# Altium PCB PMM_MSPC_22A.PcbDoc (part 5 of 5)
Units mm, origin at the board's own origin, x right, y up, seen from the top; angles counter-clockwise.
Board outline 86.91 x 61.9 mm, 4 copper layers (Top Layer, GroundPlane, MidLayer1, Bottom Layer); 159 components, 129 nets, 534 pads, 221 vias.
Unrouted connection lines stored in the file: 40.
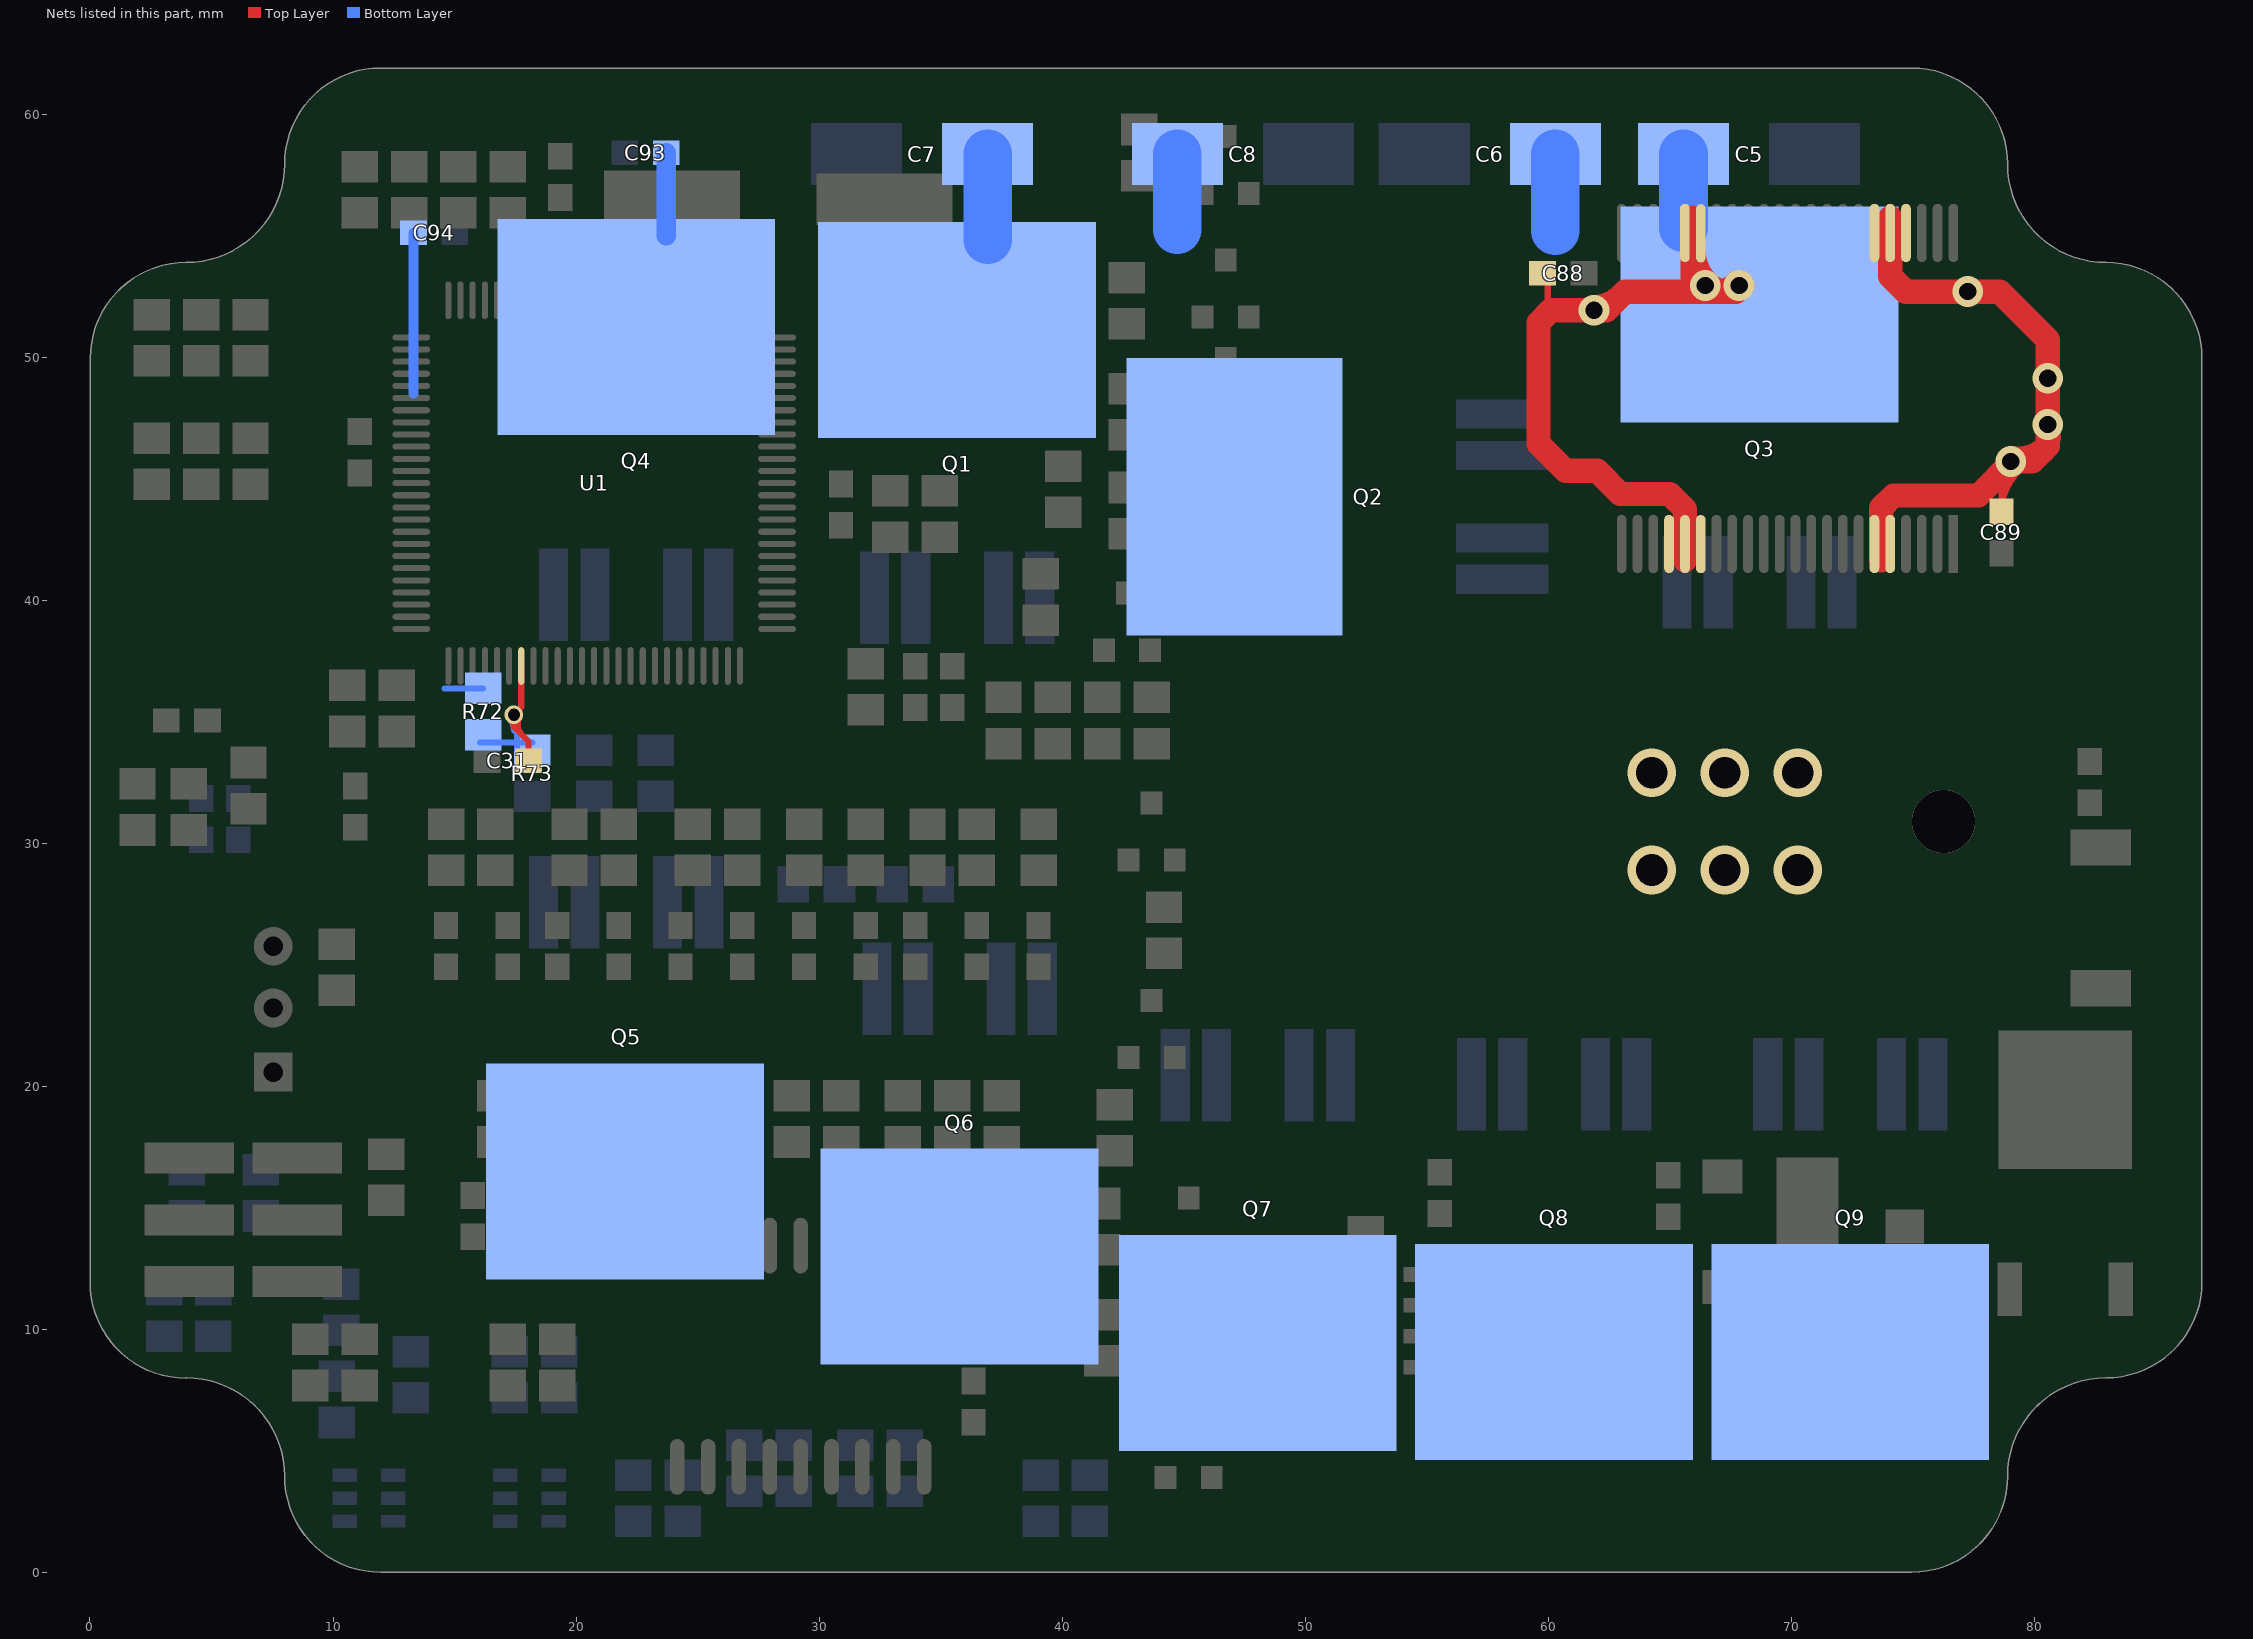
[diagram p7: the nets of this part, all layers, seen from the top]

## Via types
v1: diameter 0.762, hole 0.508, Top Layer to Bottom Layer, 138 vias
v2: diameter 2, hole 1.3, Top Layer to Bottom Layer, 26 vias
v3: diameter 1.27, hole 0.711, Top Layer to Bottom Layer, tented top, 23 vias
v4: diameter 0.762, hole 0.508, Top Layer to Bottom Layer, tented bottom, 21 vias
v5: diameter 1.27, hole 0.711, Top Layer to Bottom Layer, 7 vias
v6: diameter 0.762, hole 0.508, Top Layer to Bottom Layer, tented both sides, 5 vias
v7: diameter 2.6, hole 2.6, Top Layer to Bottom Layer, 1 vias

## Nets (pads, with @x,y where several pads share a name; then routed paths per layer and width w, separated by ;. In a path a pad name is that pad's centre, name@x,y a point inside that pad or via, vN(x,y) a via of type N, cw(c..) or ccw(c..) an arc to the next point about the centre after c; other vN are vias at no path point) (continued)
Vbatt: C5.2 C6.1 C7.1 C8.2 C88.2 C89.1 C93.1 C94.2 pad.5 pad.6 pad.17 pad.18 pad.19 pad.27 pad.28 pad.39 pad.40 pad.41 Q1.3 Q2.3 Q3.3 Q4.3 Q5.3 Q6.3 Q7.3 Q8.3 Q9.3 R72.2 | length 141.9
  Top Layer w0.254: 59.99,52.185 C88.2@59.99,53.24 ; C89.1@78.659,43.637 v3@78.659,45.581 ; C89.1@78.659,43.602 cw(c81.089,43.602) v3@79.394,45.344 ; C89.1@78.659,43.602 cw(c81.089,43.602) v3@79.394,45.344 ; C89.1@78.659,43.602 cw(c81.089,43.602) v3@79.394,45.344 ; C89.1@78.659,43.602 cw(c81.089,43.602) v3@79.394,45.344 ; C89.1@78.659,43.602 cw(c81.089,43.602) v3@79.394,45.344 ; 78.659,44.204 cw(c80.504,44.204) v3@79.217,45.526 ; 78.659,44.204 cw(c80.504,44.204) v3@79.217,45.526 ; 78.659,44.204 cw(c80.504,44.204) v3@79.217,45.526 ; 78.659,44.204 cw(c80.504,44.204) v3@79.217,45.526 ; 78.659,44.204 cw(c80.504,44.204) v3@79.217,45.526 ; 78.659,44.806 cw(c79.918,44.806) v3(79.04,45.708) ; 78.659,44.806 cw(c79.918,44.806) v3(79.04,45.708) ; 78.659,44.806 cw(c79.918,44.806) v3(79.04,45.708) ; 78.659,44.806 cw(c79.918,44.806) v3(79.04,45.708) ; 78.659,44.806 cw(c79.918,44.806) v3(79.04,45.708)
  Top Layer w1: pad.18@65.635,41.644 65.635,43.746 65.006,44.375 62.974,44.375 62.022,45.327 60.72,45.327 59.609,46.438 59.609,51.423 60.117,51.931 62.403,51.931 63.165,52.693 67.737,52.693 v3@67.991,52.947 ; v3@65.959,52.947 65.959,55.741 ; 73.706,41.644 73.706,43.803 74.214,44.311 77.711,44.311 79.108,45.708 79.929,45.708 80.564,46.343 ; pad.40@74.08,55.741 74.08,53.335 74.722,52.693 78.586,52.693 80.564,50.715 80.564,46.343 ; v3@61.895,52.066 ccw(c61.895,53.618) 62.993,52.521 ; v3@61.895,52.066 ccw(c61.895,53.618) 62.993,52.521 ; v3@61.895,52.066 ccw(c61.895,53.618) 62.993,52.521 ; v3@61.895,52.066 ccw(c61.895,53.618) 62.993,52.521 ; v3@61.895,52.066 ccw(c61.895,53.618) 62.993,52.521 ; 65.528,52.693 ccw(c65.528,53.886) v3@66.372,53.042 ; 65.528,52.693 ccw(c65.528,53.886) v3@66.372,53.042 ; 65.528,52.693 ccw(c65.528,53.886) v3@66.372,53.042 ; 65.528,52.693 ccw(c65.528,53.886) v3@66.372,53.042 ; 65.528,52.693 ccw(c65.528,53.886) v3@66.372,53.042 ; 65.959,54.499 ccw(c68.019,54.499) v3@66.562,53.042 ; 65.959,54.499 ccw(c68.019,54.499) v3@66.562,53.042 ; 65.959,54.499 ccw(c68.019,54.499) v3@66.562,53.042 ; 65.959,54.499 ccw(c68.019,54.499) v3@66.562,53.042 ; 65.959,54.499 ccw(c68.019,54.499) v3@66.562,53.042 ; v3@66.562,53.042 ccw(c67.406,53.886) v3@67.406,52.693 ; v3@66.562,53.042 ccw(c67.406,53.886) v3@67.406,52.693 ; v3@66.562,53.042 ccw(c67.406,53.886) v3@67.406,52.693 ; v3@66.562,53.042 ccw(c67.406,53.886) v3@67.406,52.693 ; v3@66.562,53.042 ccw(c67.406,53.886) v3@67.406,52.693 ; v3@66.925,52.693 ccw(c66.925,53.886) v3@67.769,53.042 ; v3@66.925,52.693 ccw(c66.925,53.886) v3@67.769,53.042 ; v3@66.925,52.693 ccw(c66.925,53.886) v3@67.769,53.042 ; v3@66.925,52.693 ccw(c66.925,53.886) v3@67.769,53.042 ; v3@66.925,52.693 ccw(c66.925,53.886) v3@67.769,53.042 ; v3@79.059,45.842 ccw(c79.31,47.596) 80.564,46.343 ; v3@79.059,45.842 ccw(c79.31,47.596) 80.564,46.343 ; v3@79.059,45.842 ccw(c79.31,47.596) 80.564,46.343 ; v3@79.059,45.842 ccw(c79.31,47.596) 80.564,46.343 ; v3@79.059,45.842 ccw(c79.31,47.596) 80.564,46.343 ; 80.374,46.153 ccw(c79.826,46.7) v3@80.454,47.153 ; 80.374,46.153 ccw(c79.826,46.7) v3@80.454,47.153 ; 80.374,46.153 ccw(c79.826,46.7) v3@80.454,47.153 ; 80.374,46.153 ccw(c79.826,46.7) v3@80.454,47.153 ; 80.374,46.153 ccw(c79.826,46.7) v3@80.454,47.153
  Bottom Layer w0.254: 14.59,36.371 R72.2@16.175,36.371
  Bottom Layer w0.4: 13.31,48.51 C94.2@13.31,55.12
  Bottom Layer w0.8: Q4.3@23.71,54.99 C93.1@23.71,58.42
  Bottom Layer w2: Q1.3@36.936,54.836 C7.1@36.936,58.362 ; 44.744,55.256 C8.2@44.744,58.362 ; 60.304,55.204 C6.1@60.304,58.362 ; Q3.3@65.572,55.328 C5.2@65.572,58.362
  other v2: 64.27,28.9 67.27,28.9 70.27,28.9 64.27,32.9 67.27,32.9 70.27,32.9
  other v3: 80.564,47.232 80.564,49.137 61.895,51.931 77.27,52.7 66.467,52.947 67.864,52.947
  other v7: 76.27,30.9
Vbatt_split: C31.1 R72.1 R73.1 U1.82 | length 27.1
  Top Layer w0.254: U1.82@17.747,37.294 17.747,35.596 v1(17.445,35.294) ; C31.1@18.041,33.389 18.041,34.19 17.445,34.786 ; v1@17.293,35.091 cw(c17.064,34.786) 17.445,34.786 ; v1@17.293,35.091 cw(c17.064,34.786) 17.445,34.786 ; v1@17.293,35.091 cw(c17.064,34.786) 17.445,34.786 ; v1@17.293,35.091 cw(c17.064,34.786) 17.445,34.786 ; v1@17.293,35.091 cw(c17.064,34.786) 17.445,34.786 ; v1@17.293,35.091 cw(c17.064,34.786) 17.445,34.786 ; v1@17.293,35.091 cw(c17.064,34.786) 17.445,34.786 ; v1@17.293,35.091 cw(c17.064,34.786) 17.445,34.786 ; v1@17.293,35.091 cw(c17.064,34.786) 17.445,34.786 ; v1@17.293,35.091 cw(c17.064,34.786) 17.445,34.786 ; 17.445,34.786 cw(c17.826,34.786) v1@17.597,35.091 ; 17.445,34.786 cw(c17.826,34.786) v1@17.597,35.091 ; 17.445,34.786 cw(c17.826,34.786) v1@17.597,35.091 ; 17.445,34.786 cw(c17.826,34.786) v1@17.597,35.091 ; 17.445,34.786 cw(c17.826,34.786) v1@17.597,35.091 ; 17.445,34.786 cw(c17.826,34.786) v1@17.597,35.091 ; 17.445,34.786 cw(c17.826,34.786) v1@17.597,35.091 ; 17.445,34.786 cw(c17.826,34.786) v1@17.597,35.091 ; 17.445,34.786 cw(c17.826,34.786) v1@17.597,35.091 ; 17.445,34.786 cw(c17.826,34.786) v1@17.597,35.091 ; 17.445,34.786 v1(17.445,35.294) ; v1(17.445,35.294) ccw(c17.907,35.058) 17.54,34.691 ; v1(17.445,35.294) ccw(c17.907,35.058) 17.54,34.691 ; v1(17.445,35.294) ccw(c17.907,35.058) 17.54,34.691 ; v1(17.445,35.294) ccw(c17.907,35.058) 17.54,34.691 ; v1(17.445,35.294) ccw(c17.907,35.058) 17.54,34.691 ; v1@17.671,35.178 ccw(c18.234,34.891) 17.787,34.444 ; v1@17.671,35.178 ccw(c18.234,34.891) 17.787,34.444 ; v1@17.671,35.178 ccw(c18.234,34.891) 17.787,34.444 ; v1@17.671,35.178 ccw(c18.234,34.891) 17.787,34.444 ; v1@17.671,35.178 ccw(c18.234,34.891) 17.787,34.444
  Bottom Layer w0.254: R72.1@16.048,34.151 R73.1@18.207,34.151 ; v1(17.445,35.294) 17.445,34.659 17.572,34.532 R73.1@17.572,33.831 ; v1@17.265,35.114 cw(c16.832,34.681) 17.445,34.681 ; v1@17.265,35.114 cw(c16.832,34.681) 17.445,34.681 ; v1@17.265,35.114 cw(c16.832,34.681) 17.445,34.681 ; v1@17.265,35.114 cw(c16.832,34.681) 17.445,34.681 ; v1@17.265,35.114 cw(c16.832,34.681) 17.445,34.681 ; 17.445,34.681 cw(c18.058,34.681) v1@17.625,35.114 ; 17.445,34.681 cw(c18.058,34.681) v1@17.625,35.114 ; 17.445,34.681 cw(c18.058,34.681) v1@17.625,35.114 ; 17.445,34.681 cw(c18.058,34.681) v1@17.625,35.114 ; 17.445,34.681 cw(c18.058,34.681) v1@17.625,35.114
pads on no net: U1.4 U1.8 U1.9 U1.12 U1.13 U1.14 U1.24 U1.25 U1.27 U1.28 U1.29 U1.35 U1.36 U1.37 U1.41 U1.42 U1.43 U1.44 U1.45 U1.46 U1.47 U1.48 U1.49 U1.50 U1.53 U1.54 U1.55 U1.56 U1.57 U1.58 U1.59 U1.60 U1.63 U1.79

## Polygon pours and split planes (outlines as drawn)
no net on GroundPlane (split plane): 40.811,34.986 40.811,29.024 37.816,26.029 19.019,26.029 15.161,29.887 15.161,36.764 16.229,37.832 18.588,37.832 18.638,37.841 18.68,37.869 20.039,39.229 36.568,39.229
GND on GroundPlane (split plane): 308 vertices, not listed, extent 0.51,0.509 86.401,61.392

## Other copper
Top Layer:
  region net GND: 76.105,51.985 63.505,51.985 63.505,50.661 60.485,50.661 60.485,46.597 63.505,46.597 63.505,45.189 63.53,45.214 76.105,45.214 76.105,46.597 79.58,46.597 79.58,50.661 76.105,50.661
Bottom Layer:
  region net Vbatt: 63.851,34.151 74.051,34.151 77.516,37.616 77.516,45.284 74.044,48.756 54.148,48.756 52.243,46.851 51.07,46.851 49.951,56.3 77.4,56.3 85.57,48.13 85.57,12.77 77.995,5.195 43.099,5.195 40.559,7.735 25.446,7.735 20.874,12.307 14.905,12.307 9.698,17.514 9.698,46.591 19.243,56.249 49.957,56.249 51.1,46.597 18.461,46.597 14.905,43.041 14.905,27.166 25.7,16.371 41.702,16.371 44.75,13.323 73.823,13.323 77,16.5 77,23.1 72.299,27.801 63.699,27.801 63.2,28.3 63.2,33.5
GroundPlane (plane layer: these items are gaps in the copper):
  lines w0.254: 15.032,29.833 15.032,36.818 16.175,37.961 18.588,37.961 19.985,39.358 36.622,39.358 40.94,35.04 40.94,28.97 37.87,25.9 18.965,25.9 15.032,29.833

## Silkscreen, mask and mechanical layers (free items; w line width, h text height)
Top Overlay:
  circle w0.254: c4.42,18.7 r0.1
  text "Q10" at 60.5,42.6 h1.2
  text "J1" at 80.1,38 h1.2
  text "K" at 66.975,9.513 h1.2
  text "K" at 74.3,7.7 h1.2
  text "MSPC_22A" at 61.2,0.6 h3
Bottom Overlay:
  text "+" at 63.5,59.4 h3
  text "+" at 41.5,58.7 h3
  text "MSPC_22A" at 75.4,0.6 h3
Top Paste:
  region: 76.105,51.985 63.505,51.985 63.505,50.661 60.485,50.661 60.485,46.597 63.505,46.597 63.505,45.189 63.53,45.214 76.105,45.214 76.105,46.597 79.58,46.597 79.58,50.661 76.105,50.661
Bottom Paste:
  region: 63.851,34.151 74.051,34.151 77.516,37.616 77.516,45.284 74.044,48.756 54.148,48.756 52.243,46.851 51.07,46.851 49.951,56.3 77.4,56.3 85.57,48.13 85.57,12.77 77.995,5.195 43.099,5.195 40.559,7.735 25.446,7.735 20.874,12.307 14.905,12.307 9.698,17.514 9.698,46.591 19.243,56.249 49.957,56.249 51.1,46.597 18.461,46.597 14.905,43.041 14.905,27.166 25.7,16.371 41.702,16.371 44.75,13.323 73.823,13.323 77,16.5 77,23.1 72.299,27.801 63.699,27.801 63.2,28.3 63.2,33.5
  lines w2: 19.858,40.628 19.858,40.374 19.858,38.85 21.064,37.644 21.509,37.199 23.101,37.199 24.752,35.548 33.352,35.548 35.765,33.135 ; 24.557,26.658 24.557,29.706 25.7,30.849 33.098,30.849 37.13,30.849 37.892,30.087 52.404,30.087 cw(c52.404,26.034) 55.27,28.9 ; 33.193,41.009 33.193,39.231 36.876,35.548 52.788,35.548 ; 35.815,33.085 55.27,33.085 ; 37.6,24.6 51.901,24.6 ; 50.1,20.9 52.9,20.9 56.77,24.77 ; 51.463,35.548 ccw(c51.463,38.747) 53.725,36.485 ; 51.901,24.626 ccw(c51.901,27.269) 53.77,25.4 ; 56.77,36.4 56.77,40.27 58.525,42.025 ; 59.77,36.4 59.77,37.844 61.919,39.993 66.594,39.993
  lines w2.4: 59.77,25.4 59.77,23.93 62.7,21 62.7,19.1 ; 71.77,25.43 75,22.2 75,19.3
Top Solder:
  region: 76.146,51.985 63.546,51.985 63.546,50.661 60.498,50.661 60.498,46.597 63.546,46.597 63.546,45.2 63.571,45.214 76.146,45.214 76.146,46.597 79.621,46.597 79.621,50.661 76.146,50.661
Bottom Solder:
  region: 63.851,34.151 74.051,34.151 77.516,37.616 77.516,45.284 74.044,48.756 54.148,48.756 52.243,46.851 51.07,46.851 49.951,56.3 77.4,56.3 85.57,48.13 85.57,12.77 77.995,5.195 43.099,5.195 40.559,7.735 25.446,7.735 20.874,12.307 14.905,12.307 9.698,17.514 9.698,46.591 19.243,56.249 49.957,56.249 51.1,46.597 18.461,46.597 14.905,43.041 14.905,27.166 25.7,16.371 41.702,16.371 44.75,13.323 73.823,13.323 77,16.5 77,23.1 72.299,27.801 63.699,27.801 63.2,28.3 63.2,33.5
  lines w2: 19.858,40.628 19.858,40.374 19.858,38.882 21.064,37.675 21.541,37.199 23.101,37.199 24.752,35.548 33.352,35.548 35.765,33.135 ; 24.557,26.658 24.557,29.706 25.7,30.849 33.098,30.849 37.13,30.849 37.892,30.087 52.404,30.087 cw(c52.404,26.034) 55.27,28.9 ; 33.193,41.009 33.193,39.231 36.876,35.548 52.788,35.548 ; 35.815,33.085 55.27,33.085 ; 37.6,24.6 51.901,24.6 ; 50.1,20.9 52.9,20.9 56.77,24.77 ; 51.463,35.548 ccw(c51.463,38.747) 53.725,36.485 ; 51.713,35.548 ccw(c51.713,38.457) 53.77,36.4 ; 51.901,24.626 ccw(c51.901,27.269) 53.77,25.4 ; 56.77,36.4 56.77,40.27 58.525,42.025 ; 59.77,36.4 59.77,37.844 61.919,39.993 66.594,39.993
  lines w2.4: 59.77,25.4 59.77,23.93 62.7,21 62.7,19.1 ; 71.77,25.43 75,22.2 75,19.3
Drill Guide:
  lines w4: 13.508,23.737 13.508,47.232
Mechanical 1:
  lines w0.127: 0.001,11.935 ccw(c3.951,11.935) 3.951,7.985 ; 0.01,49.95 cw(c3.96,49.95) 3.96,53.9 ccw(c3.96,57.95) 8.01,57.95 cw(c11.96,57.95) 11.96,61.901 ; 3.97,8 cw(c3.96,3.95) 8.01,3.95 ccw(c11.96,3.95) 11.96,0 ; 74.96,0 ccw(c74.96,3.95) 78.91,3.95 cw(c82.96,3.95) 82.96,8 ccw(c82.96,11.95) 86.91,11.95 ; 74.96,61.901 cw(c74.96,57.95) 78.91,57.95 ccw(c82.96,57.95) 82.96,53.9 cw(c82.96,49.95) 86.91,49.95
  lines w2.4: 0.01,11.95 0.01,49.95 ; 11.96,0 74.96,0 ; 11.96,61.901 74.96,61.901 ; 86.91,11.95 86.91,49.95
Mechanical 15:
  lines w0.254: 48.225,19.035 48.225,28.985 48.225,42.935 63.025,42.935 79.025,42.935 79.025,28.985 79.025,19.035 63.025,19.035 50.025,19.035